# EAGLE board zigduino-mini-1 (EAGLE 5.10)
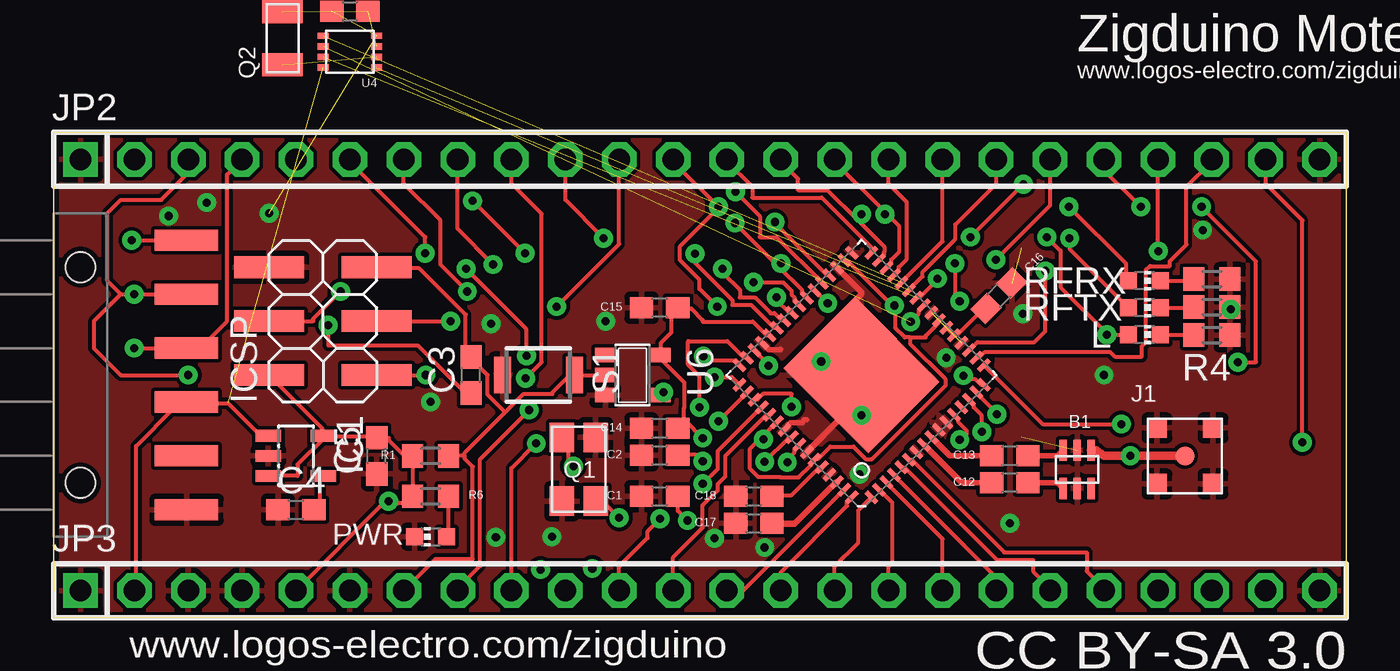
[diagram p0: board, top side]
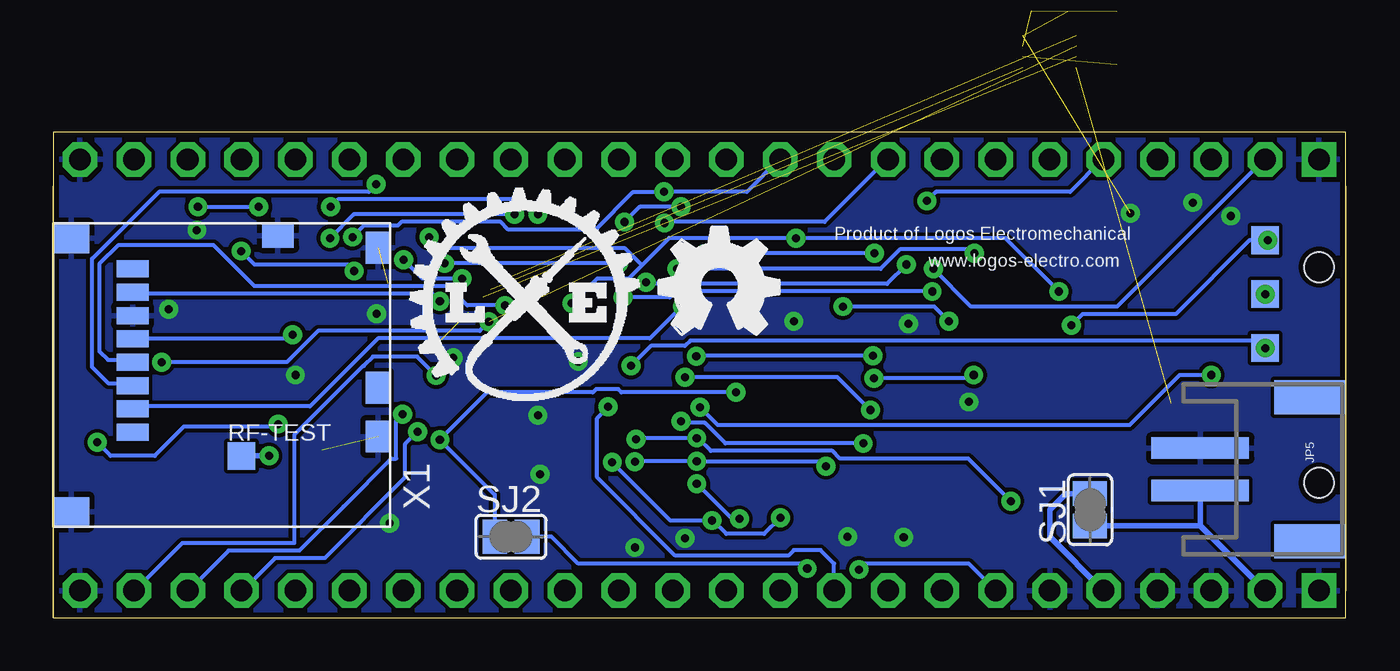
[diagram p1: board, bottom side, seen from below]

Size 60.96 x 22.86 mm. Coordinates in mm from the lower left corner, seen from the top.
Outline: 0,22.86 60.96,22.86 60.96,0 0,0 0,22.86
Copper layers (1*16): Top 0.0356mm / dielectric 1.5011mm / Bottom 0.0356mm
Design rules "hbl-panel-7mil": minimum track width 7mil, minimum drill 15mil, track to track 7mil, track to pad 7mil, pad to pad 7mil, via to via 7mil, smd to smd 0mil, copper to edge 10mil, drill to drill 8mil, minimum pad ring 12mil, minimum via ring 10mil, stop-mask expansion 0mil, vias tented up to drill 50mil, thermal gap 10mil
Net classes: 1 power: width 0.254 mm, drill 0.381 mm; 2 gnd: width 0.254 mm, drill 0.381 mm; 3 usbvcc: width 0.305 mm, drill 0.381 mm; 4 aref: width 0.305 mm; 5 rf: width 0.254 mm
Milling: 2 lines

## Footprints (pad centres in the part's own frame; a part is rotated, then mirrored left to right if it is on the bottom)
WURTH-BALUN = smd 0.35 x 1: 1 0.65,0.9; 2 0,0.9; 3 -0.65,0.9; 4 -0.65,-0.9; 5 0,-0.9; 6 0.65,-0.9
C0603 = smd 1.1 x 1: 1 -0.85,0; 2 0.85,0
SOT23-5 = smd 0.55 x 1.2: 1 -0.95,-1.3; 2 0,-1.3; 3 0.95,-1.3; 4 0.95,1.3; 5 -0.95,1.3
2X03SMD = smd 1.016 x 3.302: 1 -1.27,-3.81; 2 -1.27,1.27; 3 1.27,-3.81; 4 1.27,1.27; 5 3.81,-3.81; 6 3.81,1.27
MMCX = smd 0.89 x 0.89: C 0,0 | smd 0.94 x 0.94: GND@0 -1.32,1.32; GND@1 1.32,1.32; GND@2 -1.32,-1.32; GND@3 1.32,-1.32
1X24 = drill 1.016 square: 1 -29.21,0 | drill 1.016 octagon: 2 -26.67,0; 3 -24.13,0; 4 -21.59,0; 5 -19.05,0; 6 -16.51,0; 7 -13.97,0; 8 -11.43,0; 9 -8.89,0; 10 -6.35,0; 11 -3.81,0; 12 -1.27,0; 13 1.27,0; 14 3.81,0; 15 6.35,0; 16 8.89,0; 17 11.43,0; 18 13.97,0; 19 16.51,0; 20 19.05,0; 21 21.59,0; 22 24.13,0; 23 26.67,0; 24 29.21,0
1X06-SMD = smd 1 x 3: 1 -6.35,5; 2 -3.81,5; 3 -1.27,5; 4 1.27,5; 5 3.81,5; 6 6.35,5 | hole 1.4: -5.08,0; 5.08,0
S2B-PH = smd 1 x 4.6: 1 -1,-3.7; 2 1,-3.7 | smd 1.6 x 3.4: NC1 -3.4,1.5; NC2 3.4,1.5
CHIP-LED0603 = smd 0.8 x 0.8: A 0,-0.75; C 0,0.75
ECX-42 = smd 1.4 x 1.15: 1 -1.5,-0.8; 2 1.5,-0.8; 3 1.5,0.8; 4 -1.5,0.8
ECX-31B = smd 1.1 x 1.9: 1 -1.25,0; 2 1.25,0
R0603 = smd 1 x 1.1: 1 -0.85,0; 2 0.85,0
TP13SQ = smd 1.3 x 1.3: TP 0,0
B3U = smd 0.8 x 1.7: 1 -1.7,0; 2 1.7,0
SJ = smd 1.168 x 1.6: 1 -0.762,0; 2 0.762,0
QFN64 = smd 0.7 x 0.25: 1 -4.4,3.75; 2 -4.4,3.25; 3 -4.4,2.75; 4 -4.4,2.25; 5 -4.4,1.75; 6 -4.4,1.25; 7 -4.4,0.75; 8 -4.4,0.25; 9 -4.4,-0.25; 10 -4.4,-0.75; 11 -4.4,-1.25; 12 -4.4,-1.75; 13 -4.4,-2.25; 14 -4.4,-2.75; 15 -4.4,-3.25; 16 -4.4,-3.75; 33 4.4,-3.75; 34 4.4,-3.25; 35 4.4,-2.75; 36 4.4,-2.25; 37 4.4,-1.75; 38 4.4,-1.25; 39 4.4,-0.75; 40 4.4,-0.25; 41 4.4,0.25; 42 4.4,0.75; 43 4.4,1.25; 44 4.4,1.75; 45 4.4,2.25; 46 4.4,2.75; 47 4.4,3.25; 48 4.4,3.75 | smd 0.25 x 0.7: 17 -3.75,-4.4; 18 -3.25,-4.4; 19 -2.75,-4.4; 20 -2.25,-4.4; 21 -1.75,-4.4; 22 -1.25,-4.4; 23 -0.75,-4.4; 24 -0.25,-4.4; 25 0.25,-4.4; 26 0.75,-4.4; 27 1.25,-4.4; 28 1.75,-4.4; 29 2.25,-4.4; 30 2.75,-4.4; 31 3.25,-4.4; 32 3.75,-4.4; 49 3.75,4.4; 50 3.25,4.4; 51 2.75,4.4; 52 2.25,4.4; 53 1.75,4.4; 54 1.25,4.4; 55 0.75,4.4; 56 0.25,4.4; 57 -0.25,4.4; 58 -0.75,4.4; 59 -1.25,4.4; 60 -1.75,4.4; 61 -2.25,4.4; 62 -2.75,4.4; 63 -3.25,4.4; 64 -3.75,4.4 | smd 5.65 x 4.75: PAD 0,0
SNT-8A = smd 0.3 x 0.52: 1 -0.75,-1.265; 2 -0.25,-1.265; 3 0.25,-1.265; 4 0.75,-1.265; 5 0.75,1.265; 6 0.25,1.265; 7 -0.25,1.265; 8 -0.75,1.265
SOT23-5' = smd 0.69 x 0.99: 1 -0.95,-1.29; 2 0,-1.29; 3 0.95,-1.29; 4 0.95,1.3; 5 -0.95,1.3
MOLEX-MICRO-SD-502570 = smd 0.8 x 1.5: 1 -2.7,-3.75; 2 -1.6,-3.75; 3 -0.5,-3.75; 4 0.6,-3.75; 5 1.7,-3.75; 6 2.8,-3.75; 7 3.9,-3.75; 8 5,-3.75 | smd 1.15 x 1.5: DETECT_GND 6.575,-10.6 | smd 1.5 x 1.15: DETECT_SW -0.6,-15.325; GND@2 6,-15.325; GND@3 -2.9,-15.325 | smd 1.4 x 1.7: GND@0 -6.45,-0.85; GND@1 6.45,-0.85

## Placement (x,y rotation side)
B1  WUERTH-748421245  [WURTH-BALUN]  48.26,6.99 0 top
C1  9p  [C0603]  28.57,5.71 0 top
C2  9p  [C0603]  28.57,7.65 0 top
C3  100n  [C0603]  19.68,11.43 90 top
C4  470p  [C0603]  11.43,5.08 0 top
C5  2.2u  [C0603]  15.24,7.62 90 top
C6  7p  [C0603]  13.97,28.57 0 top  (outside the outline)
C12  22p  [C0603]  45.09,6.35 180 top
C13  22p  [C0603]  45.09,7.62 180 top
C14  100n  [C0603]  28.57,8.92 180 top
C15  100n  [C0603]  28.57,14.61 180 top
C16  100n  [C0603]  44.58,15.16 45 top
C17  100n  [C0603]  33.02,4.45 0 top
C18  100n  [C0603]  33.02,5.71 0 top
IC1  MIC5219BM5  [SOT23-5]  11.43,7.62 270 top
ICSP  [2X03SMD]  11.43,12.7 90 top
J1  73415-2061  [MMCX]  53.34,7.62 0 top
JP2  [1X24]  30.48,21.59 0 top
JP3  [1X24]  30.48,1.27 0 top
JP4  [1X06-SMD]  1.27,11.43 270 top
JP5  [S2B-PH]  3.17,6.99 270 bottom
L  [CHIP-LED0603]  51.44,13.34 270 top
LOGO1  OSHW_LOGO_FILLX0200-NT  [OSHW_FILLX200_NOTEXT]  32.38,13.34 0 bottom
PWR  [CHIP-LED0603]  17.78,3.81 90 top
Q1  ECX-42  [ECX-42]  24.77,6.99 90 top
Q2  ECS-.327-7-34B-TR  [ECX-31B]  10.79,27.3 270 top  (outside the outline)
R1  10k  [R0603]  17.78,7.62 180 top
R2  1k  [R0603]  54.61,14.63 0 top
R3  1k  [R0603]  54.61,15.95 0 top
R4  1k  [R0603]  54.61,13.31 180 top
R6  1k  [R0603]  17.78,5.71 0 top
RF-TEST  PTR1TP13SQ  [TP13SQ]  52.07,7.62 0 bottom
RFRX  [CHIP-LED0603]  51.44,15.88 270 top
RFTX  [CHIP-LED0603]  51.44,14.61 270 top
RTS-TEST  PTR1TP13SQ  [TP13SQ]  3.81,17.78 0 bottom
RXD0-TEST  PTR1TP13SQ  [TP13SQ]  3.81,12.7 0 bottom
S1  B3U-1000  [B3U]  22.86,11.43 180 top
SJ1  [SJ]  12.06,5.08 90 bottom
SJ2  [SJ]  39.37,3.81 0 bottom
TXD0-TEST  PTR1TP13SQ  [TP13SQ]  3.81,15.24 0 bottom
U3  ATMEGA128RFA1  [QFN64]  38.1,11.43 135 top
U4  S35390A-I8T1  [SNT-8A]  13.97,26.67 90 top  (outside the outline)
U6  74LVC1G17DBV  [SOT23-5']  27.3,11.43 270 top
U$4  [LOGO-SM]  44.58,9.91 0 bottom
X1  MICROSD-MOLEX-502570  [MOLEX-MICRO-SD-502570]  60.96,11.43 90 bottom

## Library data of the parts
B1 = atmega128rfa1; BOM: INCLUDE; PARTNO: 748421245
C1 C2 = resistor; PARTNO: C1608C0G1H090C
C3 C14-C18 = resistor; PARTNO: CC0603MRY5V9BB104
C4 = resistor; PARTNO: C1608X7R1H471K
C5 = resistor; PARTNO: C1608X7R1A225K
C6 C12 C13 = resistor; PARTNO: GQM1885C1H220JB01D
IC1 = v-reg-micrel; PARTNO: MIC5219-3.3YM5 TR
ICSP = pinhead-1; PARTNO: 15-91-2060
J1 = atmega128rfa1; PARTNO: 73415-2061
JP2 JP3 = pinhead; PARTNO: 68000-124HLF
JP4 = SparkFun; PARTNO: 961106-5500-AR-PR
JP5 = SparkFun; PARTNO: S2B-PH-SM4-TB(LF)(SN)
L PWR = led; COLOR: GREEN; PARTNO: LTST-C193KGKT-5A
LOGO1 = OSHW; BOM: EXCLUDE
Q1 = atmega128rfa1; BOM: INCLUDE; PARTNO: ECS-160-9-42-CKM-TR
Q2 = logos-rtc; PARTNO: ECS-.327-7-34B-TR
R1 = resistor; PARTNO: RMCF0603FT10K0
R2-R4 R6 = resistor; BOM: INCLUDE; PARTNO: RMCF0603FT1K00
RF-TEST RTS-TEST RXD0-TEST TXD0-TEST = testpad; BOM: EXCLUDE; DNP: T; PARTNO: TP13
RFRX RFTX = led; COLOR: RED; PARTNO: LTST-C193KRKT-5A
S1 = logos-faves; BOM: INCLUDE; PARTNO: B3U-1000P
SJ1 SJ2 = jumper; BOM: EXCLUDE
U3 = atmega128rfa1; BOM: INCLUDE; PARTNO: ATMEGA128RFA1-ZUR
U4 = logos-rtc; PARTNO: S-35390A-I8T1G
U6 = 74xx-little-us; BOM: INCLUDE; PARTNO: SN74LVC1G17DBVR
U$4 = logos-faves
X1 = logos-faves; PARTNO: 502570-0893

## Nets
17: JP2.23 U3.17
18: JP2.22 U3.18
19: JP2.21 U3.19
48: JP2.2 U3.48
49: JP3.8 U3.49
50: JP3.9 U3.50
51: JP3.10 U3.51
52: JP3.11 U3.52
53: JP3.12 U3.53
63: JP3.13 U3.63
64: JP3.14 U3.64
+3V3: C5.2 C14.1 C15.1 IC1.3 IC1.5 ICSP.2 JP3.5 R1.2 R6.1 SJ1.2 U3.23 U3.34 U3.44 U3.54 U3.59 U6.5 X1.4
+5V: IC1.1 JP3.2 JP4.4 JP5.2 SJ1.1 U4.8
AREF [aref]: C17.2 U3.62
GND [gnd]: B1.2 B1.5 C1.1 C2.1 C4.1 C5.1 C6.1 C14.2 C15.2 C16.2 C17.1 C18.1 IC1.2 ICSP.6 J1.GND@0 J1.GND@1 J1.GND@2 J1.GND@3 JP2.1 JP2.24 JP3.1 JP3.3 JP3.4 JP3.6 JP3.24 JP4.6 JP5.1 PWR.C Q1.2 Q1.4 R2.2 R3.2 R4.1 S1.2 U3.7 U3.10 U3.11 U3.20 U3.24 U3.33 U3.35 U3.45 U3.55 U3.58 U3.61 U3.PAD U4.4 U6.3 X1.6 X1.DETECT_GND X1.GND@0 X1.GND@1 X1.GND@2 X1.GND@3
MISO: ICSP.1 JP2.9 U3.39 X1.7
MOSI: ICSP.4 JP2.10 U3.38 X1.3
N$1: C4.2 IC1.4
N$2: L.C R4.2
N$3: PWR.A R6.2
N$4 [rf]: B1.4 C12.1
N$5: JP2.12 U3.36 X1.2
N$6: C1.2 Q1.1 U3.57
N$7: C2.2 Q1.3 U3.56
N$8: JP2.8 U3.40
N$9 [rf]: B1.3 C13.1
N$10: JP2.7 U3.41
N$11: JP2.6 U3.42
N$12: JP2.5 U3.43
N$13: JP2.20 U3.25 U4.6
N$14: JP2.19 U3.26 U4.7
N$15: JP2.18 U3.27 U4.1
N$16: JP2.17 U3.28 U4.5
N$17: JP2.16 U3.29
N$18 [gnd]: B1.1 J1.C RF-TEST.TP
N$19: JP2.15 RFTX.A U3.30
N$20: JP2.14 RFRX.A U3.31
N$21: JP2.13 U3.32
N$22: JP3.23 U3.16
N$23 [rf]: C12.2 U3.8
N$24 [rf]: C13.2 U3.9
N$25: JP3.22 U3.15
N$26: JP3.21 U3.14
N$27: JP3.20 U3.6
N$28: JP3.19 U3.5
N$29: SJ2.1 U3.12 U6.4
N$30: JP3.18 U3.4
N$31: JP3.17 U3.3
N$32: JP3.16 U3.2
N$33: JP3.15 U3.1
N$34: R2.1 RFTX.C
N$35: R3.1 RFRX.C
N$36: C6.2 Q2.1 U4.3
N$37: Q2.2 U4.2
N$63: C16.1 U3.21 U3.22
N$64: C18.2 U3.60
RESET: C3.2 ICSP.5 JP3.7 R1.1 S1.1 SJ2.2 U6.2
RTS: C3.1 JP4.1 RTS-TEST.TP
RXD0: JP2.4 JP4.3 RXD0-TEST.TP U3.46
SCK: ICSP.3 JP2.11 L.A U3.37 X1.5
TXD0: JP2.3 JP4.2 TXD0-TEST.TP U3.47

## Tracks (layer width: path | path; a pad name or v marks a point on that pad's centre or on a via)
17  (via drill 0.38)
  Top 0.178: v50.34,9.12 46.63,9.12 U3.17 | v58.88,8.26 58.88,18.72 57.15,20.45 JP2.23
  Bottom 0.178: v50.34,9.12 50.47,8.99 54.79,8.99 56.16,7.62 58.24,7.62 v58.88,8.26
18
  Top 0.178: JP2.22 54.61,21.49 53.42,20.3 53.42,17.58 52.63,16.79 52.63,16.56 51.69,16.56 51.51,16.38 51.51,12.98 51.31,12.78 51.31,12.29 50.04,12.29 49.81,12.52 43.92,12.52 43.66,12.27 43.51,12.27 U3.18
19  (via drill 0.38)
  Top 0.178: v46.76,16.33 46.76,13.49 46.25,12.98 43.56,12.98 43.18,12.6 U3.19 | v52.09,17.27 52.07,17.3 JP2.21
  Bottom 0.178: v46.76,16.33 47.07,16.64 51.46,16.64 v52.09,17.27
48  (via drill 0.38)
  Top 0.178: v30.63,12.32 30.63,12.12 32.13,12.12 32.33,11.91 U3.48 | v22.3,12.34 22.28,12.37 22.28,13.61 v19.46,16.43
  Bottom 0.178: v30.63,12.32 30.61,12.34 v22.3,12.34 | v19.46,16.43 17.68,14.66 10.79,14.66 3.86,21.59 JP2.2
49  (via drill 0.38)
  Top 0.178: v31.17,11.33 31.98,11.33 U3.49 | v22.43,9.78 20.12,7.47 20.12,2.44 19.05,1.37 JP3.8
  Bottom 0.178: v31.17,11.33 23.98,11.33 v22.43,9.78
50  (via drill 0.38)
  Top 0.178: v31.34,9.25 32.69,10.59 U3.50 | v22.76,8.2 21.59,7.04 JP3.9
  Bottom 0.178: v31.34,9.25 31.27,9.17 30.23,9.17 29.26,8.2 v22.76,8.2
51  (via drill 0.38)
  Top 0.178: v34.8,9.93 34.8,10.54 33.45,10.54 33.2,10.29 33.05,10.29 U3.51
  Bottom 0.178: v34.8,9.93 35.31,9.4 35.31,6.6 31.62,2.92 26.29,2.92 26.04,3.17 24.77,3.17 24.13,2.54 JP3.10 24.18,1.27
52  (via drill 0.38)
  Top 0.178: v30.61,6.3 31.32,7.01 31.32,7.85 33.38,9.91 U3.52 | v28.6,4.65 28.02,4.06 28.02,3.76 26.67,2.41 JP3.11
  Bottom 0.178: v30.61,6.3 28.96,4.65 v28.6,4.65
53
  Top 0.178: JP3.12 29.21,2.85 30.61,4.24 30.61,5.28 31.32,5.99 31.32,6.3 31.67,6.66 31.67,7.62 33.6,9.55 33.73,9.55 U3.53
63
  Top 0.178: U3.63 37.26,6.02 32.51,1.27 JP3.13
64
  Top 0.178: JP3.14 34.29,2.13 37.41,5.26 37.41,5.46 37.62,5.66 U3.64
+3V3  (via drill 0.38)
  Top 0.178: IC1.3 11.51,6.68 11.51,7.21 12.72,8.43 IC1.5 | IC1.5 12.8,8.51 15.16,8.51 C5.2 15.24,8.46 15.8,8.46 15.8,8.36 16.87,7.29 R1.2 16.94,7.62 16.94,5.71 R6.1 16.87,5.66 16.87,5.41 15.8,5.41 | JP3.5 15.57,5.41 15.8,5.41 | ICSP.2 12.68,8.91 12.68,8.64 IC1.5 | U3.44 33.73,13.31 33.6,13.31 32.97,13.95 30.61,13.95 30.61,14.02 30.07,14.55 29.44,14.55 C15.1 29.41,14.48 29.13,14.2 29.13,13.44 28.65,12.95 28.65,12.45 U6.5 28.63,12.29 28.63,12.19 29.74,11.07 29.74,9.88 29.72,9.86 29.72,9.2 C14.1 29.79,9.27 v30.61,8.46 | 33.4,8.51 32.82,7.92 32.82,7.04 33.22,6.63 34.27,6.63 34.29,6.6 35.13,6.6 35.71,7.19 35.71,7.26 35.87,7.42 U3.59 35.94,7.49 36.07,7.49 36.63,8.05 37.72,8.05 38.3,7.47 38.58,7.47 42.06,10.95 42.06,11.23 40.41,12.88 40.41,13.21 | 33.4,8.51 34.09,9.2 U3.54 | v33.48,8.41 33.48,8.43 33.4,8.51 | 39.6,14.66 39.7,14.55 39.7,13.64 40.13,13.21 40.41,13.21 | 39.6,14.66 37.44,16.82 37.29,16.82 U3.34 | 40.41,13.21 41.12,13.21 41.12,13.28 41.73,13.89 41.73,13.99 U3.23 | 39.6,14.66 v39.65,14.71 | 15.8,5.41 v15.8,5.49
  Bottom 0.178: v33.48,8.41 33.43,8.46 v30.61,8.46 30.53,8.43 29.95,7.85 24.21,7.85 23.85,7.49 17.8,7.49 v15.8,5.49 | v39.65,14.71 41.43,14.71 42.34,15.62 51.46,15.62 53.39,17.55 57.89,17.55 58.78,16.66 58.78,12.55 58.37,12.14 57.33,12.14 57.23,12.04 X1.4
  Bottom 0.254: SJ1.2 13.21,5.84 13.97,5.08 13.97,3.81 JP3.5
+5V  (1 unrouted)
  Top 0.178: 5.71,10.11 8.23,10.11 9.63,8.71 9.63,8.59 10.11,8.59 IC1.1 | JP3.2 3.89,1.35 3.89,8.08 5.69,9.88 | 5.77,10.16 JP4.4
  Top 0.254: 5.77,10.16 5.71,10.11 5.71,9.91 5.69,9.88
  Bottom 0.254: 3.89,1.35 JP3.2 6.67,4.13 6.86,4.32 | 6.86,4.32 SJ1.1 | JP5.2 6.88,4.33 6.86,4.32
AREF
  Top 0.305: U3.62 36.93,6.35 36.85,6.35 34.92,4.42 33.88,4.42 33.88,4.45 C17.2
GND  (via drill 0.38)  (5 unrouted)
  Top 0.254: U3.55 34.46,8.88 34.75,9.17 35.31,9.17 35.38,9.32 35.51,9.32 | U3.58 | U3.58 36.32,8.59 | v36.2,12.06 37.47,12.06 | 37.47,12.06 U3.PAD | U3.45 33.73,12.62 34.24,12.62 34.27,12.65 | U3.58 35.52,7.81 37.29,9.58 38.05,9.58 v38.1,9.53 | 37.47,12.06 37.47,14.61 38.1,15.24 38.1,15.32 U3.35
  other vias: 23.5,3.81 17.78,10.16 26.04,13.97 20.62,13.84 20.85,3.78 31.17,3.73 33.53,3.3 45.09,4.45 38,6.76 42.09,12.24 49.53,11.43 54.18,18.26 55.5,14.53 45.69,14.33 10.16,19.05 7.21,19.56 5.44,18.92
  pour Top: 0,22.86 60.96,22.86 60.96,0 0,0
  pour Bottom: 60.96,22.86 0,23.5 0,0.64 60.96,0
MISO  (via drill 0.38)
  Top 0.178: v32.13,18.59 34.16,16.56 | 34.16,16.56 35.28,15.44 35.28,15.32 35.51,15.09 U3.39 | v42.72,14.91 42.49,15.14 v42.49,16.69 | 34.16,16.56 v34.29,16.69 | ICSP.1 v17.55,11.43 | v22.25,11.28 23.01,12.04 23.01,19.02 21.59,20.45 JP2.9
  Bottom 0.178: v32.13,18.59 32.08,18.64 24.59,18.64 21.64,21.59 JP2.9 | v42.72,14.91 43.08,15.27 57.15,15.27 57.2,15.32 X1.7 | v34.29,16.69 v42.49,16.69 | v17.55,11.43 17.7,11.28 v22.25,11.28
MOSI  (via drill 0.38)
  Top 0.178: v25.93,17.88 24.13,19.68 JP2.10 | 35.89,15.42 U3.38 36.26,15.04 v36.5,14.81 | v43.23,17.93 v45.72,20.42 | ICSP.4 12.24,13.97 12.24,14.07 v13.54,15.37
  Bottom 0.178: v36.5,14.81 35.31,15.98 33.83,15.98 33.2,16.61 | 33.2,16.61 31.93,17.88 v25.93,17.88 16.05,17.88 v13.54,15.37 | v45.72,20.42 46.08,20.07 55.96,20.07 59.11,16.92 59.13,16.92 59.13,11.81 58.37,11.05 57.33,11.05 57.23,10.95 X1.3 | v43.23,17.93 42.7,17.4 33.98,17.4 33.2,16.61
N$1
  Top 0.178: C4.2 12.29,5.08 12.57,5.36 12.57,6.5 12.72,6.66 IC1.4
N$2
  Top 0.178: L.C 53.75,13.34 53.75,13.31 R4.2
N$3
  Top 0.178: PWR.A 18.54,3.81 18.62,3.89 18.62,5.71 R6.2
N$4
  Top 0.254: C12.1 47.34,6.35 B1.4
N$5  (via drill 0.38)
  Top 0.178: v34.01,18.64 34.01,18.59 36.42,16.18 36.42,16.15 36.58,16.15 U3.36 | JP2.12 29.21,21.49 v31.34,19.36 31.32,19.28 29.54,17.5 29.54,16.84 30.45,15.93 30.45,15.49 v31.29,14.66
  Bottom 0.178: v34.01,18.64 33.3,19.36 v31.34,19.36 | v31.29,14.66 31.32,14.66 32.82,13.16 45.64,13.16 48.84,9.96 57.1,9.96 57.2,9.86 X1.2
N$6  (via drill 0.38)
  Top 0.178: v34.59,7.32 34.59,7.44 34.92,7.77 34.92,7.9 35.15,8.13 U3.57 | v29.9,4.57 29.44,5.03 C1.2 | v26.67,4.7 26.04,5.33 26.04,5.46 25.58,5.46 Q1.1
  Bottom 0.178: v34.59,7.32 31.85,4.57 v29.9,4.57 29.82,4.55 29.21,3.94 27.43,3.94 v26.67,4.7
N$7  (via drill 0.38)
  Top 0.178: v33.53,7.34 34.67,8.48 34.8,8.48 U3.56 | v30.61,7.37 30.3,7.67 29.44,7.67 C2.2 | v24.51,7.14 24.28,7.37 24.28,8.18 23.98,8.48 Q1.3
  Bottom 0.178: v33.53,7.34 33.5,7.37 v30.61,7.37 30.53,7.34 24.71,7.34 v24.51,7.14
N$8  (via drill 0.38)
  Top 0.178: v32.99,15.8 34.39,15.8 34.8,15.39 34.8,15.21 34.92,15.09 34.92,14.96 35.15,14.73 U3.40 | v20.73,16.64 19.05,18.31 JP2.8
  Bottom 0.178: v32.99,15.8 32.92,15.72 21.64,15.72 v20.73,16.64
N$9
  Top 0.254: C13.1 47.34,7.62 B1.3
N$10  (via drill 0.38)
  Top 0.178: v34.09,15.09 34.09,14.96 34.67,14.38 34.8,14.38 U3.41 | v19.51,15.37 18.24,16.64 18.24,18.72 16.51,20.45 JP2.7
  Bottom 0.178: v34.09,15.09 31.88,15.09 31.6,15.37 v19.51,15.37
N$11  (via drill 0.38)
  Top 0.178: v31.55,16.43 31.55,16.26 32.36,15.44 32.36,15.09 33.07,15.09 33.78,14.38 33.78,14.35 33.98,14.35 34.31,14.02 34.44,14.02 U3.42 | v17.53,17.17 17.53,17.93 13.97,21.49 JP2.6
  Bottom 0.178: v31.55,16.43 21.95,16.43 21.03,17.35 17.7,17.35 v17.53,17.17
N$12  (via drill 0.38)
  Top 0.178: v30.25,17.14 30.25,16.71 32,14.96 32,14.73 32.89,14.73 33.96,13.66 34.09,13.66 U3.43 | v19.76,19.63 v22.23,17.17
  Bottom 0.178: v30.25,17.14 30.23,17.17 v22.23,17.17 | v19.76,19.63 19.33,20.07 13.01,20.07 11.48,21.59 JP2.5
N$13  (via drill 0.38)  (1 unrouted)
  Top 0.178: v40.41,13.95 40.79,14.33 40.79,14.48 41.02,14.71 U3.25 | v55.83,12.04 56.69,12.04 56.69,16.79 v54.13,19.36 | v51.26,19.36 49.53,21.08 JP2.20
  Bottom 0.178: v40.41,13.95 40.84,13.51 48.46,13.51 49.94,12.04 v55.83,12.04 | v54.13,19.36 v51.26,19.36
N$14  (via drill 0.38)  (1 unrouted)
  Top 0.178: v41.68,15.98 41.68,15.93 40.84,15.09 40.69,15.09 U3.26 | v44.42,16.87 46.99,19.43 JP2.19
  Bottom 0.178: v41.68,15.98 43.54,15.98 v44.42,16.87
N$15  (1 unrouted)
  Top 0.178: JP2.18 44.45,20.45 42.52,18.52 42.52,17.83 40.97,16.28 40.97,16.08 40.34,15.44 U3.27
N$16  (1 unrouted)
  Top 0.178: JP2.17 41.91,17.73 39.98,15.8 U3.28
N$17
  Top 0.178: JP2.16 39.37,20.45 40.23,19.58 40.23,16.89 39.85,16.51 39.85,16.38 39.62,16.15 U3.29
N$18  (via drill 0.38)
  Top 0.406: B1.1 49.16,7.88 49.53,7.62 v50.77,7.62 J1.C
  Bottom 0.254: v50.77,7.62 RF-TEST.TP
N$19  (via drill 0.38)
  Top 0.178: 39.24,19.07 36.83,21.49 JP2.15 | 39.24,19.07 39.88,18.44 39.88,17.25 39.5,16.87 39.5,16.74 39.27,16.51 U3.30 | v47.9,17.88 47.9,17.37 50.67,14.61 RFTX.A | v39.19,19 39.19,19.02 39.24,19.07
  Bottom 0.178: v47.9,17.88 46.79,19 v39.19,19
N$20  (via drill 0.38)
  Top 0.178: 37.87,18.77 36.5,20.14 35.1,20.14 35.1,20.68 34.29,21.49 JP2.14 | 37.87,18.77 39.17,17.48 39.17,17.22 39.14,17.2 39.14,17.04 38.94,16.84 U3.31 | v47.88,19.36 50.55,16.69 50.55,16 50.67,15.88 RFRX.A | 37.87,18.77 v38.1,19
  Bottom 0.178: v47.88,19.36 47.52,19.71 38.81,19.71 v38.1,19
N$21
  Top 0.178: JP2.13 31.75,21.49 32.94,20.3 32.94,19.79 36.22,19.79 38.53,17.48 38.53,17.22 U3.32
N$22  (via drill 0.38)
  Top 0.178: v42.9,11.4 42.9,11.25 43.43,11.25 43.71,10.97 43.84,10.97 U3.16
  Bottom 0.178: v42.9,11.4 43.79,12.29 45.87,12.29 46.3,11.86 46.33,11.86 49.58,8.61 49.58,3.5 54.86,3.5 57.1,1.27 JP3.23
N$23
  Top 0.254: C12.2 42.83,6.35 U3.8
N$24
  Top 0.254: C13.2 42.26,7.62 U3.9
N$25  (via drill 0.38)
  Top 0.178: v44.48,9.58 44.48,9.63 43.51,10.59 U3.15
  Bottom 0.178: v44.48,9.58 44.78,9.27 44.78,7.49 45.01,7.49 47.27,5.23 49.35,3.15 52.68,3.15 54.56,1.27 JP3.22
N$26  (via drill 0.38)
  Top 0.178: v43.76,8.76 43.76,9.53 43.38,9.91 43.38,10.06 43.18,10.26 U3.14
  Bottom 0.178: v43.76,8.76 44.35,8.18 44.35,6.6 48.16,2.79 50.49,2.79 52.02,1.27 JP3.21
N$27
  Top 0.178: JP3.20 49.53,1.37 48.72,2.18 48.72,3.07 44.83,3.07 40.49,7.42 40.34,7.42 U3.6
N$28
  Top 0.178: JP3.19 46.99,1.37 46.18,2.18 46.18,2.72 44.48,2.72 40.13,7.06 39.98,7.06 U3.5
N$29  (via drill 0.38)
  Top 0.178: v42.72,8.38 42.77,8.38 43.05,8.66 43.05,8.81 42.67,9.2 42.67,9.35 42.47,9.55 U3.12 | v28.75,10.62 28.22,10.52 28.6,10.52 U6.4
  Bottom 0.178: v28.75,10.62 34.16,10.62 34.31,10.77 35.36,10.77 35.51,10.62 40.49,10.62 v42.72,8.38 40.13,5.79 SJ2.1
N$30
  Top 0.178: JP3.18 44.45,1.88 39.62,6.71 U3.4
N$31
  Top 0.178: JP3.17 41.91,3.71 39.27,6.35 U3.3
N$32
  Top 0.178: JP3.16 39.37,2.41 39.55,2.59 39.55,5.41 38.94,6.02 U3.2
N$33
  Top 0.178: JP3.15 36.83,2.41 37.95,3.53 37.95,5.05 U3.1
N$34
  Top 0.178: RFTX.C 53.75,14.61 53.75,14.63 R2.1
N$35
  Top 0.178: RFRX.C 53.75,15.88 53.75,15.95 R3.1
N$36  (2 unrouted)
N$37  (1 unrouted)
N$63
  Top 0.178: U3.22 42.11,13.64 U3.21 42.52,13.34 42.62,13.34 43.84,14.55 43.97,14.55 C16.1
N$64
  Top 0.178: U3.60 36.22,7.06 36.07,7.06 36.07,7.04 34.8,5.77 33.88,5.77 33.88,5.71 C18.2
RESET  (via drill 0.38)
  Top 0.178: U6.2 S1.1 24.49,11.38 24.28,11.38 23.52,10.62 23.52,10.54 22.15,10.54 21.29,9.68 | C3.2 19.63,12.34 | ICSP.5 15.24,16.46 17.25,16.46 19.43,14.28 19.43,12.6 19.61,12.42 C3.2 | 19.38,7.62 19.38,7.77 21.29,9.68 | 19.38,7.62 R1.1 | JP3.7 18.01,2.77 19.76,2.77 19.76,7.11 19.38,7.49 19.38,7.62 | C3.2 19.71,12.19 20.47,11.43 20.47,10.49 21.29,9.68 | v25.4,2.31 25.12,2.31 24.89,2.54 23.24,2.54 v22.96,2.26
  Bottom 0.178: SJ2.2 37.47,3.81 36.2,2.54 25.63,2.54 v25.4,2.31 | v22.96,2.26 22.96,2.44 22.86,2.54 17.78,2.54 JP3.7
RTS  (via drill 0.38)
  Top 0.178: v12.95,13.77 12.95,12.83 17.17,12.83 19.28,10.72 19.28,10.59 19.68,10.59 C3.1 | v3.68,17.78 JP4.1
  Bottom 0.178: v12.95,13.77 12.42,14.3 8.03,14.3 4.55,17.78 RTS-TEST.TP
  Bottom 0.254: RTS-TEST.TP v3.68,17.78
RXD0  (via drill 0.38)
  Top 0.178: v33.71,11.86 33.71,11.91 33.05,12.57 U3.46 | 3.43,12.7 RXD0-TEST.TP JP4.3 6.91,12.7 8.18,13.97 8.18,20.88 JP2.4
  Bottom 0.178: v33.71,11.86 32.77,12.8 31.17,12.8 30.91,13.06 4.17,13.06 RXD0-TEST.TP
  other vias: 3.81,12.7
SCK  (via drill 0.38)
  Top 0.178: L.A v49.66,13.34 49.63,13.41 47.47,15.57 47.47,17.3 v46.84,17.93 | v32.16,20.07 33.3,18.92 33.3,17.93 34.09,17.93 36.22,15.8 U3.37 | ICSP.3 v18.72,13.97 | v23.72,14.66 26.67,17.6 JP2.11
  Bottom 0.178: v49.66,13.34 49.86,13.13 X1.5 | JP2.11 26.72,21.59 28.25,20.07 v32.16,20.07 32.23,20.04 33.63,20.04 35.38,18.29 39.5,18.29 39.85,18.64 44.53,18.64 44.7,18.47 46.3,18.47 v46.84,17.93 | v18.72,13.97 19.41,14.66 v23.72,14.66
TXD0  (via drill 0.38)
  Top 0.178: v30.45,9.91 30.45,11.38 29.92,11.91 29.92,13.03 31.77,13.03 32.54,12.27 32.69,12.27 U3.47 | JP2.3 6.35,20.95 5.08,19.68 3.17,19.68 2.54,19.05 2.54,15.88 3.17,15.24 | 3.17,15.24 TXD0-TEST.TP JP4.2 6.35,15.24 | v6.35,11.43 3.17,11.43 1.91,12.7 1.91,13.97 3.17,15.24
  Bottom 0.178: v30.45,9.91 29.62,9.07 10.21,9.07 7.85,11.43 v6.35,11.43 | 3.81,15.06 TXD0-TEST.TP 3.91,15.04 3.89,15.04
  other vias: 3.81,15.24

## Text on the board
tNames: Zigduino Mote | www.logos-electro.com/zigduino | www.logos-electro.com/zigduino | CC BY-SA 3.0
bNames: Product of Logos Electromechanical | www.logos-electro.com
Reference: C8 | R7 | R5 | R6 | R4 | C3 | C2 | R9 | R8 | R1 | R2 | C1 | C4 | C5 | X2 | C7 | C6